# Altium PCB NTP_Clock_stm32f107.PcbDoc (part 1 of 2)
Units mil, origin at the board's own origin, x right, y up, seen from the top; angles counter-clockwise.
Board outline 2362.2 x 3149.61 mil, 2 copper layers (Top Layer, Bottom Layer); 87 components, 65 nets, 304 pads, 151 vias.
Unrouted connection lines stored in the file: 12.
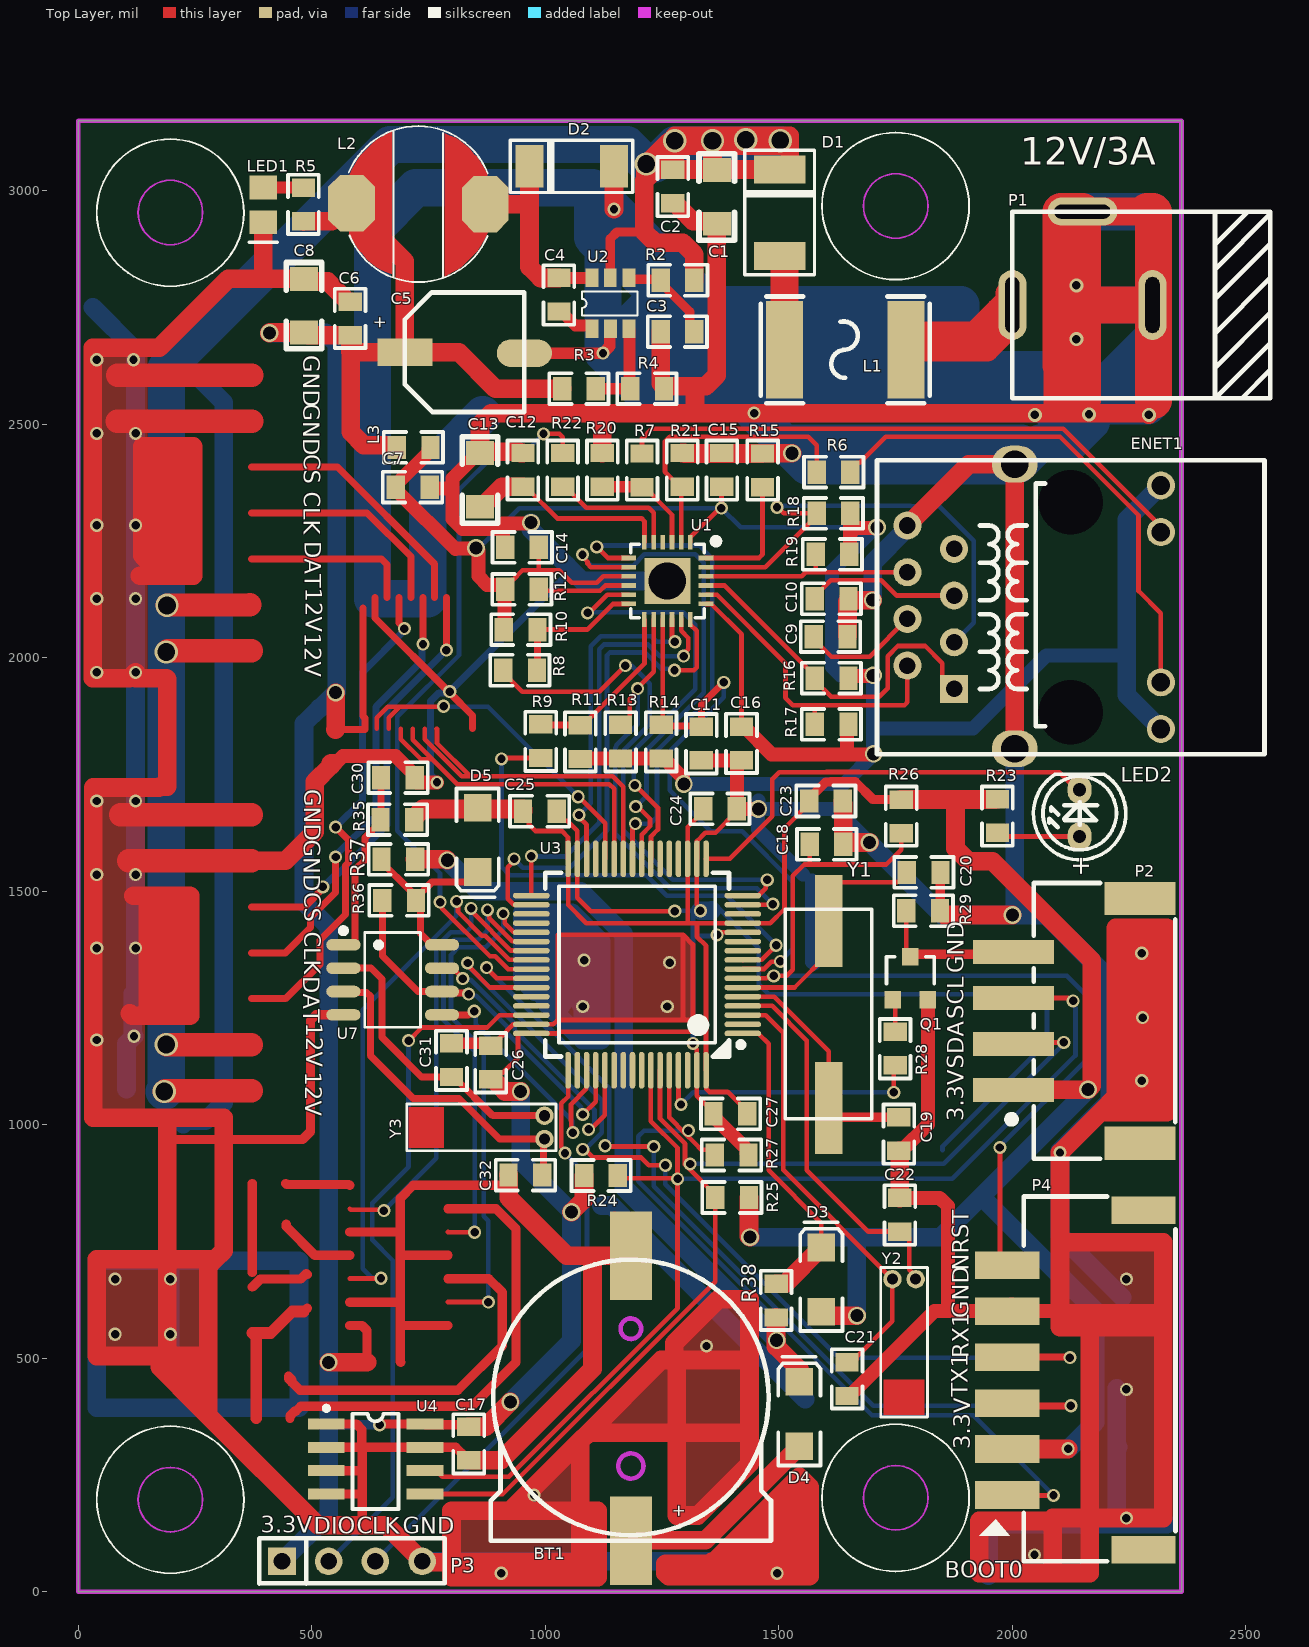
[diagram p0: Top Layer view]
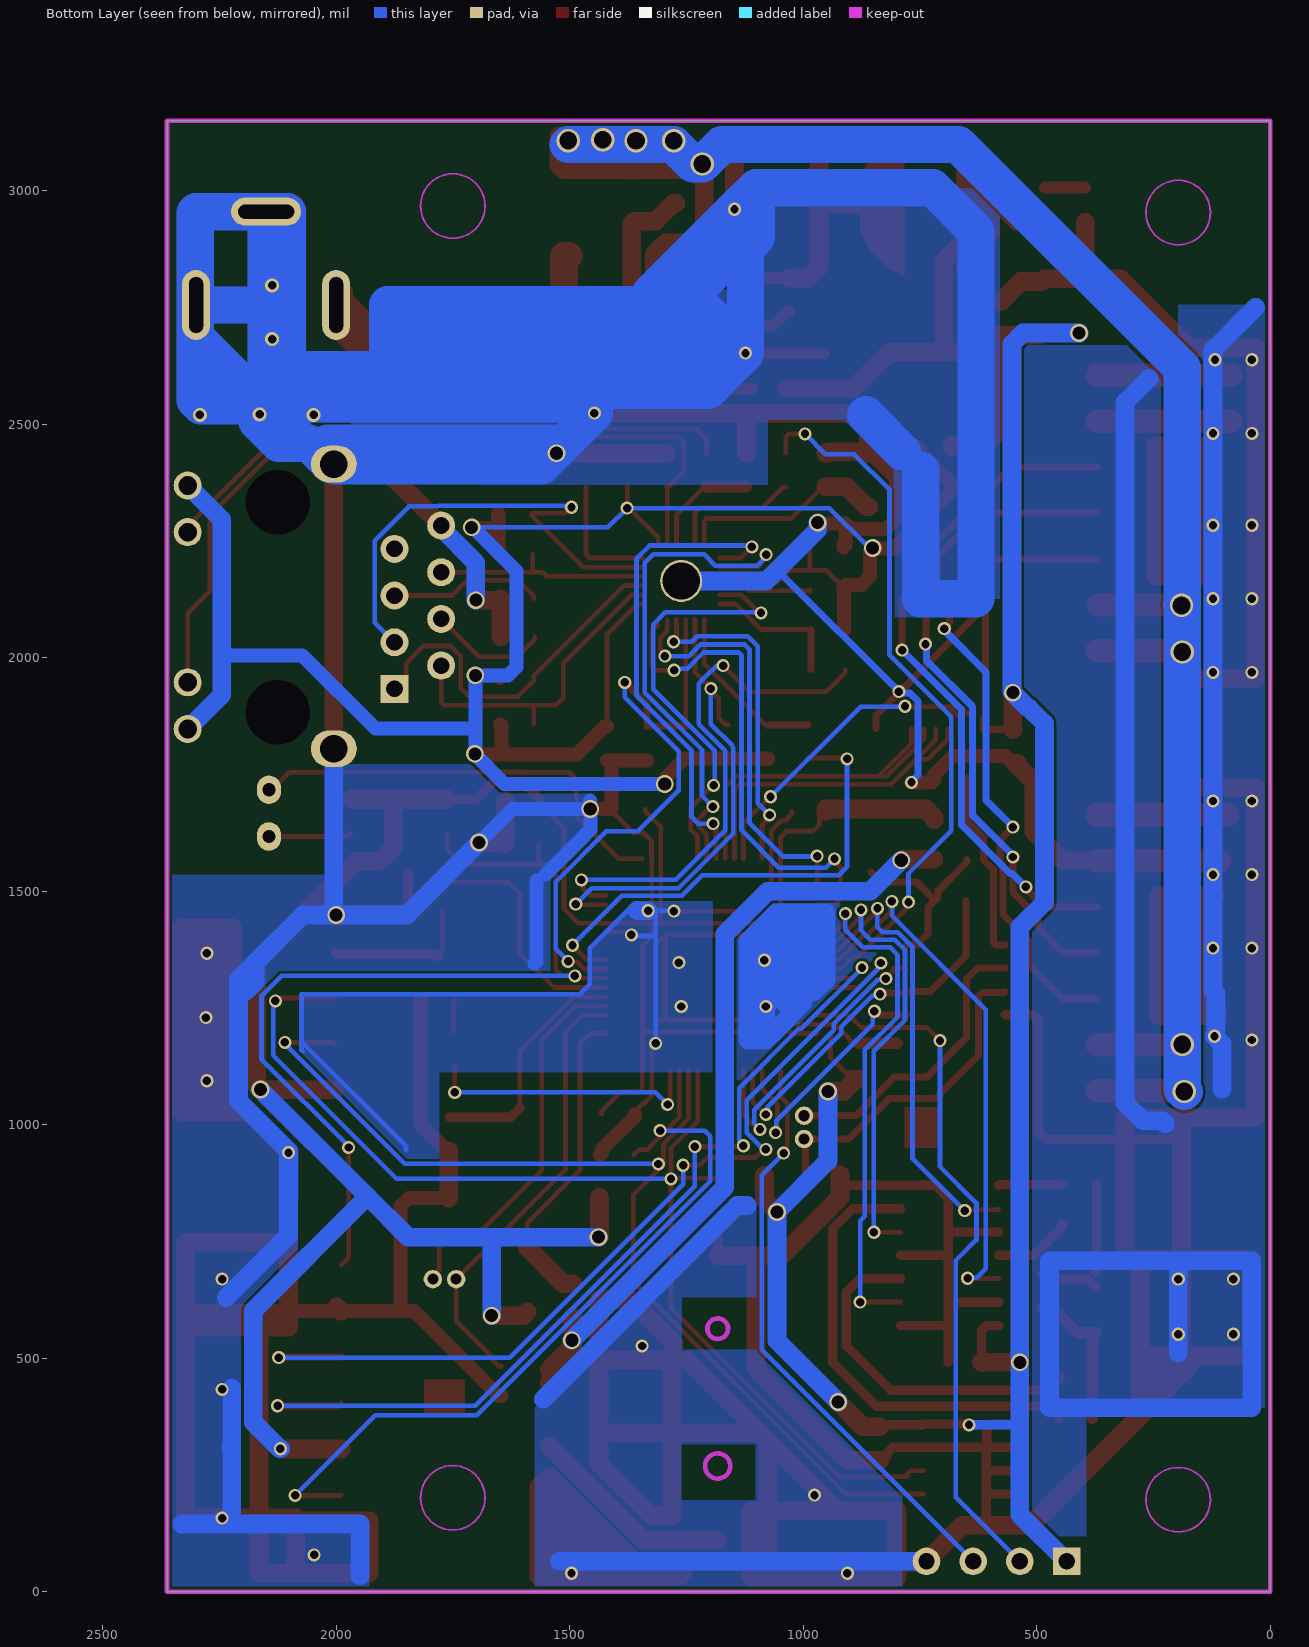
[diagram p1: Bottom Layer view, seen from below]

## Layer stack, top to bottom
Top Solder: solder mask 0.4, Solder Resist, Dk 3.5
Top Layer: signal copper 1.4
Dielectric 1: dielectric 12.6, FR-4, Dk 4.8
Bottom Layer: signal copper 1.4
Bottom Solder: solder mask 0.4, Solder Resist, Dk 3.5

## Board outline
0,0 2362.2,0 2362.2,3149.61 0,3149.61

## Design rules (kind name [scope] priority, off if disabled: settings)
Clearance [All] p1: gap=6 ignorepadtopadclearanceinfootprint=FALSE
ComponentClearance [All] p1: gap=10 collisioncheckmode=3 verticalgap=10 showdistances=FALSE donotcheckwithout3dbody=TRUE
HoleSize [All] p1: absolutevalues=TRUE maxlimit=1000 minlimit=1 maxpercent=80.000 minpercent=20.000
HoleToHoleClearance [All] p1: gap=0 allowstackedmicrovias=TRUE
MinimumSolderMaskSliver [All] p1: minsoldermaskwidth=0
PlaneConnect [All] p1: planeconnectstyle=Direct reliefexpansion=20 reliefentries=4 reliefconductorwidth=10 reliefairgap=10
PolygonConnect [All] p1: connectstyle=Direct reliefconductorwidth=10 reliefentries=4 polygonreliefangle="90 Angle" airgapwidth=10
RoutingVias [All] p1: holewidth=18 width=28 viastyle="Through Hole" minholewidth=18 minwidth=28 maxholewidth=28 maxwidth=50
SilkToSilkClearance [All] p1: silktosilkclearance=0
SilkToSolderMaskClearance [IsPad] p1: minsilkscreentomaskgap=0 clearancetoexposedcopper=TRUE
SolderMaskExpansion [All] p1: expansion=4 istentingtop=FALSE
Width [All] p1: maxlimit=100 minlimit=10 preferedwidth=20 minimp=50.000000 maximp=50.000000 favimp=50.000000
23 further rules are at their usual default settings.

## Components (designator, comment, footprint, x,y, rotation, side; value= is the part's Value field where it differs from the comment)
BT1 "电池座" BAT-3V 1183,269 r90 top
C1 "10UF" 1206 1367,2986.5 r270 top
C2 "0.1UF" 0805 1273,3009 r270 top
C3 "0.1UF" 0805 1283,2698 r180 top
C4 "0.01UF" 0805 1029,2777 r270 top
C5 "100UF/25V" "电容 铝电解 100u/25V" 700.09,2653.92 r270 top
C6 "0.1uF" 0805 582,2726 r90 top
C7 "0.1uF" 0805 716,2365 r180 top
C8 "10uF" 1206 483,2753.5 r270 top
C9 "0.1uF" 0805 1611,2045 r180 top
C10 "0.1uF" 0805 1613,2126 r180 top
C11 "0.1uF" 0805 1334,1816 r270 top
C12 "0.1uF" 0805 952,2402 r270 top
C13 "10uF" 1206 860,2380.5 r270 top
C14 "0.1uF" 0805 950,2236 r0 top
C15 "0.1uF" 0805 1378,2402 r270 top
C16 "0.1uF" 0805 1420,1816 r90 top
C17 "0.1uF" 0805 836,317 r270 top
C18 "0.1uF" 0805 1602,1600 r0 top
C19 "22P" 0805 1757,980 r270 top
C20 "22P" 0805 1810,1540 r0 top
C21 "12P" 0805 1646,455 r90 top
C22 "12P" 0805 1759,807 r270 top
C23 "0.1uF" 0805 1601,1693 r180 top
C24 "0.1uF" 0805 1374,1676 r180 top
C25 "0.1uF" 0805 988,1671 r180 top
C26 "0.1uF" 0805 883,1133 r270 top
C27 "0.1uF" 0805 1396,1023 r0 top
C30 "0.1uF" 0805 684,1743 r0 top
C31 "12P" 0805 799,1138 r270 top
C32 "12P" 0805 957,892 r0 top
D1 "IN5824" "二极管 贴片 4007" 1502,2860 r90 top
D2 "IN5819" "二极管 贴片 2010" 1147,3052 r180 top
D3 "1N5819" "二极管 贴片 IN4148" 1591,599 r90 top
D4 "1N5819" "二极管 贴片 IN4148" 1544,311.2 r90 top
D5 "1N5819" "二极管 贴片 IN4148" 855,1678.8 r270 top
ENET1 "HR911105A" RJ-45A12 2318,1847 r0 top
L1 "30V/4A" F2920 1642,2659 r180 top
L2 "10UH" "电感 贴片 5.5*5.5" 729,2971 r180 top
L3 "Insure" 0805 718,2450 r180 top
LED1 "红色" Led0805 396,3007 r270 top
LED2 "红色" LED5_单色 2144,1617 r90 top
P1 "2.1mm" "Power  2.1mm" 2000,2755 r180 top
P2 "XH2.54-4P" CONN-SMD_HCZZ0021-4 2138,1222 r90 top
P3 "2.54 1*4" "单排插针 2.54 1*4" 436,65 r0 top
P4 "2.54 1*6" CONN-SMD_6P-P2.50_BX-HA2.54-6PWT 2135,453 r90 top
Q1 "AO3400" sot23d 1781.6,1359.52 r0 top
R2 "51K" 0805 1283,2808 r0 top
R3 "6.2K" 0805 1072,2576 r180 top
R4 "2K" 0805 1218,2576 r180 top
R5 "10K" 0805 482,2970 r90 top
R6 "510R" 0805 1617,2397 r0 top
R7 "510R" 0805 1207,2401 r90 top
R8 "510R" 0805 946,1973 r180 top
R9 "510R" 0805 990,1821 r270 top
R10 "1K" 0805 947,2060 r0 top
R11 "1K" 0805 1075,1819 r90 top
R12 "10K" 0805 950,2146 r180 top
R13 "1K" 0805 1161,1820 r270 top
R14 "1K" 0805 1248,1820 r270 top
R15 "12.1K" 0805 1465,2401 r90 top
R16 "49.9R" 0805 1613,1956 r180 top
R17 "49.9R" 0805 1613,1857 r180 top
R18 "49.9R" 0805 1617,2309 r180 top
R19 "49.9R" 0805 1615,2221 r180 top
R20 "10K" 0805 1122,2402 r270 top
R21 "10K" 0805 1293,2402 r270 top
R22 "0" 0805 1037,2402 r270 top
R23 "1K" 0805 1968,1661 r270 top
R24 "10K" 0805 1119,891 r0 top
R25 "10K" 0805 1400,844 r180 top
R26 "10K" 0805 1762,1660 r90 top
R27 "100K" 0805 1399,935 r180 top
R28 "1K" 0805 1749,1163 r270 top
R29 "100k" 0805 1809,1458 r0 top
R35 "10K" 0805 683,1653 r0 top
R36 "10K" 0805 687,1480 r180 top
R37 "0" 0805 685,1568 r0 top
R38 "0" 0805 1494,623 r90 top
U1 "LAN8720A" QFN24 1261.28,2164.16 r270 top
U2 "MP2359" SOT23-6 1100,2704 r90 top
U3 "stm32f107rct6" stm32f107rct6 1196.37,1342.79 r90 top
U4 "贴片芯片 AT24C02" SOIC8 531,359 r270 top
U7 "DS1302" SOP-8_L4.9-W3.9-P1.27-LS6.0-BL 673,1310 r270 top net-tie
Y1 "8M" "晶振 BCY-W2/E4.7_贴" 1607,1436 r270 top
Y2 "32.768k" "晶振 卧 8*2mm" 1733,669 r270 top
Y3 "32.768Khz" "晶振 卧 8*2mm" 998,1029 r180 top

## Footprints (in the part's own frame and the unit in brackets; to place one, negate y for a bottom-side part, rotate by r counter-clockwise, add the part's x,y. Pads: shape width x height; smd on the part's side, far side on the other; paste and mask are expansions set on the pad)
0805 [mil]
  rect 39.37x50 smd: 1(-36,0) 2(36,0)
  silkscreen extent -63,-33 64,33
1206 [mil]
  rect 51.18x60 smd: 1(-57.5,0) 2(57.5,0)
  silkscreen extent -93,-38 93,38
BAT-3V [mil]
  rect 190x90 smd: 1(-160,0) 2(450,0)
  Keep-Out Layer circle w10: c0,0 r27
  Keep-Out Layer circle w10: c294,0 r22
  silkscreen extent -160,-300 442,300
CONN-SMD_6P-P2.50_BX-HA2.54-6PWT [mm]
  rect 1.5x3.5 smd paste+0 mask+0.05: 1(-6.25,3.7) 2(-3.75,3.7) 3(-1.25,3.7) 4(1.25,3.7) 5(3.75,3.7) 6(6.25,3.7) 7(9.23,-3.7) 8(-9.23,-3.7)
  silkscreen extent -9.86,-5.44 9.99,5.22
CONN-SMD_HCZZ0021-4 [mm]
  rect 1.3x4.4 smd mask+0.051: 1(-3.75,3.438) 2(-1.25,3.438) 3(1.25,3.438) 4(3.75,3.438)
  rect 1.8x3.85 smd mask+0.051: 5(-6.65,-3.438) 6(6.65,-3.438)
  silkscreen extent -7.5,-5.35 7.5,3.75
F2920 [mm]
  rect 2x5.3 smd mask+0.051: 1(-3.3,0) 2(3.3,0)
  silkscreen extent -4.6,-2.9 4.6,2.9
LED5_单色 [mm]
  oval 1.554x1.3 hole 0.711: 1(0,0) 2(2.54,0)
  silkscreen extent -1.27,-2.51 3.39,2.51
Led0805 [mm] "Chip Capacitor; Body 2.0 x 1.2 mm (LxW typ)"
  rect 1.3x1.5 smd: 1(0,0) 2(1.9,0)
  silkscreen extent 2.98,-0.76 2.98,0.76
"Power  2.1mm" [mil]
  oval 60x150 hole 30 slot 120 at 90 deg: 1(-300,0) 3(0,0)
  oval 150x60 hole 30 slot 120 at 0 deg: 2(-150,-200)
  silkscreen extent -552,-200 0,200
QFN24 [mm]
  rect 0.8x0.25 smd: 1(-2.101,1.25) 2(-2.101,0.75) 3(-2.101,0.25) 4(-2.101,-0.25) 5(-2.101,-0.75) 6(-2.101,-1.25) 13(2.101,-1.25) 14(2.101,-0.75) 15(2.101,-0.25) 16(2.101,0.25) 17(2.101,0.75) 18(2.101,1.25)
  rect 0.25x0.8 smd: 7(-1.25,-2.101) 8(-0.75,-2.101) 9(-0.25,-2.101) 10(0.25,-2.101) 11(0.75,-2.101) 12(1.25,-2.101) 19(1.25,2.101) 20(0.75,2.101) 21(0.25,2.101) 22(-0.25,2.101) 23(-0.75,2.101) 24(-1.25,2.101)
  rect 2.5x2.5 smd: 25(0,0)
  silkscreen extent -2.31,-2 2,2.79
RJ-45A12 [mil]
  round 130 hole 137.8: 0(-192.91,35.83) 0(-192.91,485.83)
  rect 60x60 hole 35.43: 1(-442.91,85.83)
  round 60 hole 35.43: 2(-542.91,135.83) 3(-442.91,185.83) 4(-542.91,235.83) 5(-442.91,285.83) 6(-542.91,335.83) 7(-442.91,385.83) 8(-542.91,435.83)
  round 60 hole 40: 9(0,0) 10(0,100) 11(0,421.65) 12(0,521.65)
  oval 98.43x78.74 hole 59.06: 13(-312.99,-42.13) 14(-312.99,567.32)
  silkscreen extent -608,-54 222,576, body extent -605,-53 237,572, height 59
SOIC8 [mm]
  rect 0.6x2 smd: 1(0,0) 2(1.27,0) 3(2.54,0) 4(3.81,0) 5(3.81,5.367) 6(2.54,5.367) 7(1.27,5.367) 8(0,5.367)
  silkscreen extent -0.97,-0.12 4.62,3.93
SOP-8_L4.9-W3.9-P1.27-LS6.0-BL [mm]
  oval 0.63x1.865 smd mask+0.051: 1(-1.905,-2.682) 2(-0.635,-2.682) 3(0.635,-2.682) 4(1.905,-2.682) 5(1.905,2.682) 6(0.635,2.682) 7(-0.635,2.682) 8(-1.905,2.682)
  silkscreen extent -2.82,-2.83 2.58,1.52
SOT23-6 [mm]
  rect 1x0.7 smd: 1(0,0) 2(-0.002,-1) 3(-0.001,-2) 4(2.769,-2.007) 5(2.769,-0.991) 6(2.769,0)
  silkscreen extent 0.73,-2.48 2.04,0.55
sot23d [mm]
  rect 0.9x0.95 smd: 1(0,0) 2(-0.95,-2.35) 3(0.95,-2.35)
  silkscreen extent -1.3,-1.48 1.3,0
stm32f107rct6 [mm]
  oval 0.3x2 smd mask+0.051: 1(-3.75,-5.75) 2(-3.25,-5.75) 3(-2.75,-5.75) 4(-2.25,-5.75) 5(-1.75,-5.75) 6(-1.25,-5.75) 7(-0.75,-5.75) 8(-0.25,-5.75) 9(0.25,-5.75) 10(0.75,-5.75) 11(1.25,-5.75) 12(1.75,-5.75) 13(2.25,-5.75) 14(2.75,-5.75) 15(3.25,-5.75) 16(3.75,-5.75) 33(3.75,5.75) 34(3.25,5.75) 35(2.75,5.75) 36(2.25,5.75) 37(1.75,5.75) 38(1.25,5.75) 39(0.75,5.75) 40(0.25,5.75) 41(-0.25,5.75) 42(-0.75,5.75) 43(-1.25,5.75) 44(-1.75,5.75) 45(-2.25,5.75) 46(-2.75,5.75) 47(-3.25,5.75) 48(-3.75,5.75)
  oval 2x0.3 smd mask+0.051: 17(5.75,-3.75) 18(5.75,-3.25) 19(5.75,-2.75) 20(5.75,-2.25) 21(5.75,-1.75) 22(5.75,-1.25) 23(5.75,-0.75) 24(5.75,-0.25) 25(5.75,0.25) 26(5.75,0.75) 27(5.75,1.25) 28(5.75,1.75) 29(5.75,2.25) 30(5.75,2.75) 31(5.75,3.25) 32(5.75,3.75) 49(-5.75,3.75) 50(-5.75,3.25) 51(-5.75,2.75) 52(-5.75,2.25) 53(-5.75,1.75) 54(-5.75,1.25) 55(-5.75,0.75) 56(-5.75,0.25) 57(-5.75,-0.25) 58(-5.75,-0.75) 59(-5.75,-1.25) 60(-5.75,-1.75) 61(-5.75,-2.25) 62(-5.75,-2.75) 63(-5.75,-3.25) 64(-5.75,-3.75)
  silkscreen extent -5,-5.79 5,5
"二极管 贴片 2010" [mil]
  rect 60x91 smd: 1(0,0) 2(181,0)
  silkscreen extent -40,-56 222,56
"二极管 贴片 4007" [mil]
  rect 60x110 smd: 1(0,0) 2(185,0)
  silkscreen extent -40,-74 226,75
"二极管 贴片 IN4148" [mm] "SMT LED; 2 Flat Leads"
  rect 1.5x1.5 smd: 1(0,0) 2(3.5,0)
  silkscreen extent -1.04,-1.15 4.88,1.15
"单排插针 2.54 1*4" [mm]
  rect 1.5x1.5 hole 0.9: 1(0,0)
  round 1.5 hole 0.889: 2(2.54,0) 3(5.08,0) 4(7.62,0)
  silkscreen extent -1.23,-1.21 8.85,1.25
"晶振 BCY-W2/E4.7_贴" [mm]
  rect 5x1.5 smd: 1(0,0) 2(10.16,0)
  silkscreen extent -0.65,-2.38 10.75,2.32
"晶振 卧 8*2mm" [mm]
  round 1 hole 0.6: 1(0,0.254) 2(0,1.524)
  Top Layer region: 5.461,-0.229 7.391,-0.229 7.391,2.007 5.461,2.007
  silkscreen extent -0.64,-0.38 7.49,2.16
"电容 铝电解 100u/25V" [mm]
  rect 1.5x3 smd: 1(-0.001,-0.025)
  oval 1.5x3 smd: 2(0.049,6.475)
  silkscreen extent -3.25,-0.03 3.25,6.47
"电感 贴片 5.5*5.5" [mil]
  oct 100.11x120.48 smd: 1(144,-1.97) 2(-142,0)
  Top Layer region: 151,-59 149.27,-60.73 144,-74 127,-102 94,-135 89,-139 74,-147 61,-154 57,-158 57,156 57,153 57,150.6 66,147 81,141 92,134 108,121 110,119 111,118 121,105 126,101 136,87 143,74 149.57,64.62 149,64.05 149,49
  Top Layer region: -149,58 -147.27,59.73 -142,73 -125,101 -92,134 -87,138 -72,146 -59,153 -55,157 -55,-152 -64,-148 -79,-142 -90,-135 -106,-122 -108,-120 -109,-119 -119,-106 -124,-102 -134,-88 -141,-75 -147.57,-65.62 -147,-65.05 -147,-50
  silkscreen extent -148,-167 150,167

## Part data
C1 C2 C3 C4 C6: library part CAP
C5: library part ELECTRO1
C7 C8 C9 C10 C11 C12 C13 C14 C15 C16 C17 C18 C19 C20 C21 C22 C23 C24 C25 C26 C27 C30 C31 C32: library part "电容 贴片", 单位=个, 名称=贴片电容, 封装=0805
D1: library part "二极管 1N5822", 单位=个, 名称=二极管, 封装=直插
D2: library part DIODE
D3 D4 D5: library part "二极管 贴片 1N4148", 单位=个, 名称=贴片二极管, 封装=贴片
ENET1: "带灯以太网接口", BOM名称=带灯以太网接口, 学习资源=www.ooocke.com, 版权归属=源创客
L1: library part 保险_自恢复, 单位=个, 名称=自恢复保险管, 封装=0805
L2: library part INDUCTOR1
L3: library part "保险 自恢复", 单位=个, 名称=自恢复保险管, 封装=0805
LED1: library part "贴片发光二极管 0805", 单位=个, 名称=贴片发光二极管, 封装=0805
LED2: library part "发光二极管 Φ3", "D_RED_D", 单位=个, 名称=发光二极管, 封装=Φ3
P1: library part "联结件 XH2.54-2", 单位=套, 名称=联结件, 封装=VH3.96-2
P2: library part "联结件 XH2.54-4", 单位=套, 名称=联结件, 封装=XH2.54-4
P3: library part "连接件 单排插针 2.54 1*4", 单位=片, 名称=单排插针, 封装=DIP
P4: library part "连接件 单排插针 2.54 1*6", 单位=片, 名称=单排插针, 封装=DIP
Q1: library part "MOS管 AO3400", 单位=个, 名称=N沟道MOS, 封装=TO-220
R2 R3 R4: library part RES2
R5 R23 R27: library part "贴片电阻 0805", 单位=个, 名称=贴片电阻, 封装=0805
R6 R7 R8 R9 R10 R11 R12 R13 R14 R15 R16 R17 R18 R19 R20 R21 R22 R24 R25 R26 R35 R36 R37 R38: library part "电阻 贴片", 单位=个, 名称=贴片电阻, 封装=0805
R28 R29: library part "贴片电阻 0603", 单位=个, 名称=贴片电阻, 封装=0603
U1: library part LAN8720, "ETH PHY"
U7: "工业级 具有涓细电流充电能力的低功耗实时时钟芯片", JLCPCB Part Class="Extended Part", LCSC Part Name=DS1302ZM, Manufacturer=HGSEMI(华冠), Add into BOM=yes, Convert to PCB=yes, Device=DS1302ZM, Manufacturer Part=DS1302ZM, Name=DS1302, Supplier=LCSC, Supplier Footprint=SOP-8, Supplier Part=C910859, Symbol=DS1302ZM
Y1 Y2: library part "晶振 直插矮", 单位=个, 名称=晶振, 封装=直插矮
Y3: library part "晶振 直插", 单位=个, 名称=晶振, 封装=直插矮
BT1: LatestRevisionDate=17-Jul-2002, LatestRevisionNote="Re-released for DXP Platform.", PackageReference=BAT-2, Published=24-Mar-1999, Publisher="Altium Limited"
U4: 单位=片, 名称=贴片芯片, 封装=SOIC4

## Free pads (board coordinates)
  round 90 hole 80: 6(1261.28,2164.16)

## Via types
v1: diameter 28, hole 18, Top Layer to Bottom Layer, 115 vias
v2: diameter 38, hole 28, Top Layer to Bottom Layer, 22 vias
v3: diameter 50, hole 38, Top Layer to Bottom Layer, 9 vias
v4: diameter 30, hole 18, Top Layer to Bottom Layer, 5 vias

## Nets (pads, with @x,y where several pads share a name; then routed paths per layer and width w, separated by ;. In a path a pad name is that pad's centre, name@x,y a point inside that pad or via, vN(x,y) a via of type N, cw(c..) or ccw(c..) an arc to the next point about the centre after c; other vN are vias at no path point)
3.3V: C5.1 C6.1 C8.2 C17.1 C23.2 C24.2 C25.2 C26.2 C27.2 D3.1 D5.1 L2.1 L3.2 P2.4 P3.1 P4.5 R3.2 R5.1 R23.1 R24.1 R25.1 R26.2 R35.2 U3.13 U3.19 U3.32 U3.48 U3.64 U4.8 | length 12129.9
  Top Layer w10: C26.2@883,1097 897.69,1111.69 909.69,1111.69 941.54,1143.54 941.54,1194.31 U3.48@942.37,1195.15 ; C25.2@963,1670 965,1668 965,1642 978.19,1628.81 1035.19,1628.81 1048.38,1615.62 1048.38,1569.51 U3.32@1048.73,1569.16 1048.73,1470.27 1087.63,1431.37 1306,1431.37 ; U3.48@970,1195.15 1025.15,1195.15 1029,1199 1341.01,1199 1344.01,1202 ; C24.2@1338,1676 1338,1670.69 1304.64,1637.33 U3.19@1304.64,1569.16 1304.64,1432.73 1306,1431.37 ; C27.2@1432,1023 1432,1028.31 1390.31,1070 1350.77,1070 1344.36,1076.42 1344.36,1116.07 U3.64@1344.01,1116.42 1344.01,1202 ; C23.2@1565,1693 1565,1687.69 1512,1634.69 1512,1461.64 1481.73,1431.37 U3.13@1422.74,1431.37 1324.5,1431.37 ; 1306,1431.37 1324.5,1431.37 ; 1324.5,1431.37 1324.5,1402.5 1344.01,1382.99 1344.01,1202
  Top Layer w15: 546,1846 550.69,1846 613.4,1846 613.4,1848 613.4,1870.5 609.46,1874.44 609.46,2105.75
  Top Layer w20: 581,570 607.18,570 618,559.18 618,491 ; v1(645,357) 647,359 U4.8@742.3,359 744.11,357.19 831.81,357.19 C17.1@836,353 ; C23.2@1565,1693 1565,1698.31 1600.19,1733.5 1610.19,1733.5 1610.69,1734 1663.31,1734 1701.31,1696 R26.2@1762,1696
  Top Layer w40: v2(409.14,2694.86) 410.28,2696 487.41,2696 493.41,2690 C6.1@582,2690 582,2655 583.03,2653.97 ; R5.1@482,2934 482.31,2934.31 543.22,2934.31 581.87,2972.97 L2.1@585,2972.97 585,2962.78 699.09,2848.69 C5.1@699.09,2653.97 ; v2(536,491) 618,491 ; 550.69,1846 551,1846.31 v2(551,1925) ; L3.2@682,2450 682,2454.69 681.69,2455 611,2455 583.03,2482.97 583.03,2653.97 ; R35.2@719,1653 719,1657.69 737.31,1676 951.69,1676 952,1675.69 C25.2@952,1671 ; C17.1@836,353 836.31,353.31 872.31,353.31 v2(925,406) ; C26.2@883,1097 887.69,1097 913.69,1071 v2(947,1071) ; R3.2@1035.69,2576 893,2576 815.03,2653.97 C5.1@699.09,2653.97 ; v2(1056,813) 1082.69,839.69 1082.69,890.69 R24.1@1083,891 ; R25.1@1436,844 1436,761 v2(1438,759) ; D3.1@1591,599 1599,591 v2(1667,591) ; R26.2@1762,1696 1878,1696 ; R23.1@1968,1697 1963.31,1697 1962.31,1696 1878,1696 ; 1989.33,305.37 2118.72,305.37 v1(2119.35,306) ; 2002.66,1074.36 2161.36,1074.36 v2(2162,1075) 2170,1083 2170,1351.28 1957.28,1564 1906,1564 1878,1592 1878,1696 ; 583.03,2653.97 C5.1@699.09,2653.97
  Bottom Layer w20: 536,357 v1(645,357)
  Bottom Layer w40: v2(409.14,2694.86) 409.28,2695 529.57,2695 553,2671.57 553,1927 v2(551,1925) 517.92,1891.92 516.36,1891.92 483.28,1858.85 483.28,1475.72 536,1423 v2(536,491) 536,357 536,165 P3.1@436,65 ; v2(925,406) 1056,537 v2(1056,813) 947,922 v2(947,1071) ; v2(1438,759) 1665,759 ; v2(1667,591) 1667,757 1665,759 ; v1(2119.35,306) 2121,306 2177.71,362.71 2177.71,601.29 1933,846 ; v2(2162,1075) 1933,846 ; 1665,759 1846,759 1933,846
12V: C1.1 C2.1 D1.2 R2.2 U2.5 | length 5505.6
  Top Layer w20: U2.5@1139,2813 1139,2897 1153.43,2911.43 1212,2911.43
  Top Layer w40: v3(188.44,1171.56) v3@188.65,1171.35 ; v3(188.44,2011.88) v3@191.22,2014.65 ; 367.17,2116.55 371,2112.72 ; 370.52,1171.35 370.73,1171.14 ; 370.65,2014.65 371,2014.3 ; v3@1216.2,3056.8 1264.28,3104.89 1274.29,3104.89 v3@1277,3102.18 ; v3@1277,3117.61 v3@1358,3117.61 ; R2.2@1319,2808 1318.69,2808.31 1318.69,2863.31 1294,2888 1235.43,2888 1212,2911.43 1212,3021.25 ; C1.1@1361.59,3045 C2.1@1276.69,3045 ; C1.1@1367,3044 1363.59,3044 C1.1@1362.59,3045 ; 1212,3021.25 1214.09,3023.34 1214.09,3054.89 v3(1216,3056.8) 1237.8,3056.8 v3@1277,3096 ; 1212,3021.25 1235.43,3044.69 1272.69,3044.69 C2.1@1273,3045 C2.1@1276.69,3045 ; C2.1@1276.69,3045 1277,3045.31 v3@1277,3096 ; v3@1277,3096 v3@1358,3096 ; v3@1358,3096 1501.39,3096 v3@1523,3117.61 ; v3@1358,3096 v3@1358,3117.61 ; v3@1358,3096 1358,3049.59 C1.1@1362.59,3045 ; v3@1358,3117.61 v3@1523,3117.61 ; C1.1@1362.59,3045 D1.2@1502,3045 1513,3045 1523,3055 v3@1523,3117.61
  Top Layer w50: v3(184,1071) 185.73,1072.72 370.73,1072.72 ; v3@188.65,1171.35 370.52,1171.35 ; v3(189.76,2111.76) 190.72,2112.72 366.58,2112.72 367.17,2113.31 ; v3@191.22,2014.65 370.65,2014.65
  Bottom Layer w80: v3(184,1071) 188.44,1075.44 v3(188.44,2011.88) 188.44,2110.44 v3(189.76,2111.76) 188.44,2113.07 188.44,2619.71 667.34,3098.61 1174.2,3098.61 v3(1216,3056.8) 1235.2,3056.8 1277,3098.61 1358,3098.61 1429,3098.61 v3@1503,3098.61
  other v3: 1277,3106.8 1358,3106.8 1503,3107 1429,3109
battery: D4.2 R37.2 R38.1 | length 1668.8
  Top Layer w40: R37.2@721,1568 788,1568 v2(790,1566) ; R38.1@1494,587 1494,525 v2@1496,523 ; v2(1495.28,538.28) 1495.28,523.72 D4.2@1544,475 ; D4.2@1544,447 D4.2@1544,449
  Bottom Layer w40: v2(790,1566) 856,1500 1076,1500 1168,1408 1168,865.56 v2(1495.28,538.28)
BOOT0: P4.6 R27.2 U3.60 | length 1716.5
  Top Layer w10: U3.60@1265.27,1116.42 1265.27,1015.36 v1@1299.81,980.81 ; v1(1306.18,987.18) v1@1299.81,980.81 ; R27.2@1363,935 1351.55,946.45 1334.17,946.45 1320,960.63 v1@1299.81,980.81 ; 1989.33,206.93 1990.27,206 v1(2088,206)
  Bottom Layer w10: v1(1306.18,987.18) 1211.18,987.18 1199,975 1199,878.4 1699.4,378 1916,378 v1(2088,206)
DS1302_CE: U3.51 U7.5 | length 568.2
  Top Layer w10: v1(1059,983) 1055.56,986.44 1055.56,1008.29 1055,1008.85 1055,1043.87 1087.75,1076.62 1087.75,1116.07 U3.51@1088.1,1116.42
  Top Layer w15: U7.5@778.61,1235 835.13,1235 842.81,1242.68 v1(847.68,1242.68)
  Bottom Layer w10: v1(847.68,1242.68) 851,1239.36 851,1215.29 1057.69,1008.6 1057.69,984.31 v1(1059,983)
DS1302_CLK: U3.53 U7.7 | length 654.7
  Top Layer w10: U7.7@778.61,1335 806.93,1335 806.93,1329.85 823,1313.77 v1(823,1312.62) ; v1(1092.46,989.86) 1097.33,989.86 1127.47,1020 U3.53@1127.47,1116.42
  Bottom Layer w10: v1(823,1312.62) 825.26,1310.37 840,1310.37 934.52,1215.85 934.52,1202.48 1105,1032 1105,1002.4 v1(1092.46,989.86)
DS1302_DATA: R36.2 U3.52 U7.6 | length 810.1
  Top Layer w10: U7.6@778.61,1285 U7.6@781.39,1282.22 ; v1@832.79,1282.22 v1(835.57,1279.45) ; v1(1080,1021.64) 1107.79,1049.42 U3.52@1107.79,1116.42
  Top Layer w15: R36.2@651,1480 651,1361 727,1285 U7.6@778.61,1285 ; U7.6@781.39,1282.22 v1@832.79,1282.22
  Bottom Layer w10: v1(835.57,1279.45) 839.01,1276 851.74,1276 918.52,1209.22 918.52,1195.48 1076.56,1037.44 1076.56,1025.09 v1(1080,1021.64)
ENET_3.3V: C7.2 C14.2 C15.2 C16.2 ENET1.9 ENET1.12 L3.1 R10.1 R11.1 R12.2 R13.2 R14.2 R16.1 R17.1 R18.1 R19.1 U1.1 U1.9 U1.19 | length 5329.8
  Top Layer w10: R12.2@914,2151.31 928.69,2166 930,2166 951,2187 989.69,2187 ; C14.2@986,2236 986,2190.69 989.69,2187 ; U1.9@1178.55,2174 1123.92,2174 1109.92,2160 1056.69,2160 1029.69,2187 989.69,2187 ; U1.1@1310.49,2246.88 1310.49,2257.55 1372.94,2320 v1(1377,2320) 1377,2365 C15.2@1378,2366 ; U1.19@1344,2114.94 1354.67,2114.94 1420,2049.61 C16.2@1420,1852
  Top Layer w30: L3.1@754,2450 749.31,2445.31 749.31,2439.63 680,2370.31 C7.2@680,2365 684.69,2360.31 684.69,2355 807.09,2232.59 807.79,2233.29 849.65,2233.29 v2(851.18,2234.82) ; v2@853.41,2232.59 856.47,2229.53 856.47,2174.45 875.3,2155.62 909.31,2155.62 914,2150.94 R12.2@914,2146 912.5,2144.5 912.5,2061.5 R10.1@911,2060 ; R11.1@1075,1783 1075.5,1783.5 R14.2@1247.5,1783.5 ; R14.2@1248,1784 R14.2@1247.5,1783.5 ; v2(1296.47,1729.53) 1294.94,1731.06 1294.94,1742.38 1253.81,1783.5 R14.2@1247.5,1783.5 ; C16.2@1420,1852 1425.31,1852 1484.31,1793 1645,1793 ; R17.1@1649,1857 1646.16,1854.16 1646.16,1794.16 1645,1793 ; R16.1@1649,1956 1653.47,1960.47 1700.47,1960.47 v2(1702,1962) ; R19.1@1651,2221 1652,2222 1652,2265 ; R18.1@1653,2309 1652,2308 1652,2265 ; v2(1703,1794) 1695.32,1793 1645,1793 ; v2@1708.43,2279 v2(1709.92,2279) 1708.39,2277.47 1664.47,2277.47 1652,2265
  Bottom Layer w10: v2(851.18,2234.82) 858.7,2234.82 943.88,2320 v1(1377,2320) 1418,2279 1699.89,2279 v2@1703.94,2274.94
  Bottom Layer w30: v2(1296.47,1729.53) 1639.53,1729.53 1703,1793 v2(1703,1794) ; v2@1702,1794 1702,1848 ; v2(1709.92,2279) 1708,2279 1703.94,2274.94 1614,2185 1614,1979.57 1631.57,1962 v2(1702,1962) 1702,1848 ; 2245,2005 2073,2005 1916,1848 1702,1848
  Bottom Layer w40: ENET1.9@2318,1847 2245,1920 2245,2005 2245,2295.65 ENET1.12@2318,2368.65
ENET_LED1: R7.1 R20.2 U1.3 | length 233.2
  Top Layer w10: R7.1@1207,2365 1212.31,2365 1271.12,2306.2 U1.3@1271.12,2246.88
  Top Layer w25: R20.2@1122,2366 1122.5,2365.5 1206.5,2365.5 R7.1@1207,2365
ENET_LED2: R6.1 R21.2 U1.2 | length 630.3
  Top Layer w10: R21.2@1290.53,2363.53 R21.2@1290.8,2363.8 ; U1.2@1290.8,2246.88 R21.2@1290.8,2363.8 ; R6.1@1581,2397 1581,2455 1563,2473 1266.34,2473 1256,2462.66 1256,2397.69 1287.69,2366 R21.2@1293,2366 R21.2@1290.8,2363.8
ENET_RXN: ENET1.6 R19.2 U1.22 | length 473.7
  Top Layer w10: U1.22@1344,2174 1549,2174 1557.83,2182.83 1577,2182.83 ; R19.2@1579,2221 1579,2184.83 1577,2182.83 ; ENET1.6@1775.09,2182.83 1577,2182.83
ENET_RXP: ENET1.3 R18.2 U1.23 | length 1089.1
  Top Layer w10: U1.23@1344,2193.69 1471,2193.69 ; v1(1496,2322) 1497.87,2322 1510.87,2309 R18.2@1581,2309 1581,2303.69 1487.16,2209.84 ; 1471,2193.69 1487.16,2209.84 ; 1471,2193.69 1487.16,2209.84
  Bottom Layer w10: v1(1496,2322) 1496.44,2322.44 1508.47,2322.44 1510.86,2324.83 1782.57,2324.83 1783.4,2324 1843.32,2324 1846.25,2321.07 1917.09,2250.23 1917.09,2074.83 ENET1.3@1875.09,2032.83
ENET_TXN: ENET1.2 R17.2 U1.20 | length 695.1
  Top Layer w10: U1.20@1344,2134.63 1344.08,2134.55 1367.45,2134.55 1514,1988 1514,1914 1530,1898 1576,1898 ; R17.2@1577,1857 1577,1892 1576,1893 1576,1898 ; ENET1.2@1775.09,1982.83 1775.09,1904.09 1769,1898 1576,1898
ENET_TXP: ENET1.1 R16.2 U1.21 | length 777.3
  Top Layer w10: U1.21@1344,2154.31 1384,2154.31 1577,1961.31 R16.2@1577,1956 1577,1950.69 1611.69,1916 1715,1916 1733,1934 1733,2003 1754.83,2024.83 1813.17,2024.83 1850.09,1987.91 1850.09,1957.83 ENET1.1@1875.09,1932.83